# Allegro board SHEMA 2.7 .brd
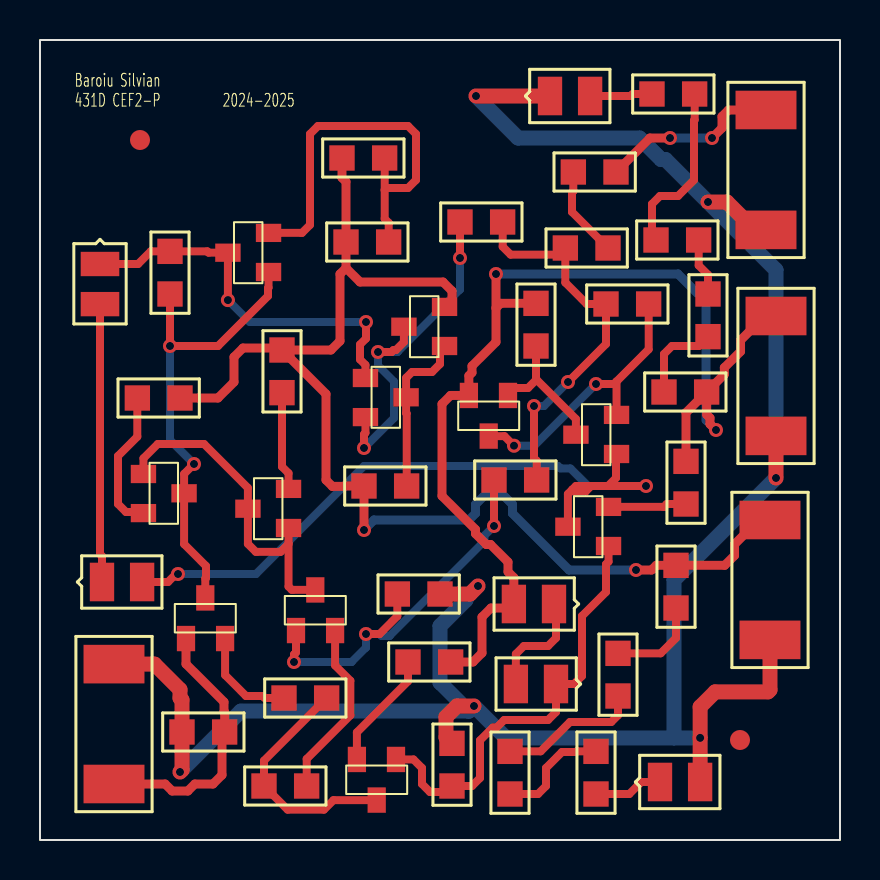
[diagram p0: board, top side]
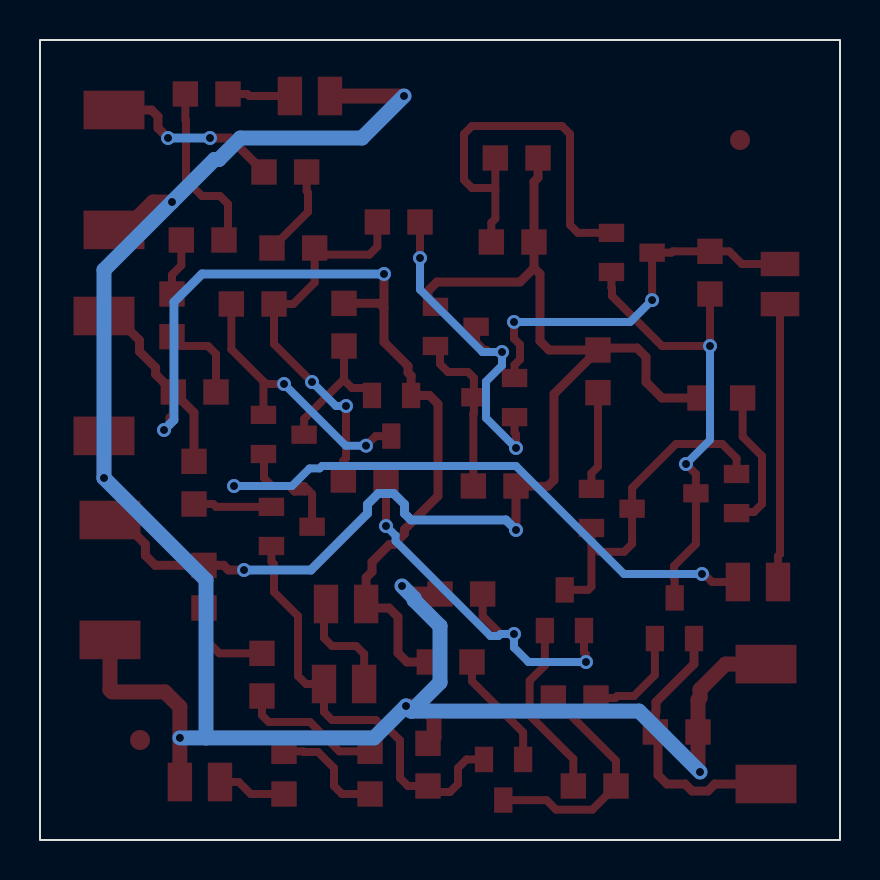
[diagram p1: board, bottom side, seen from below]

Outline 40 x 40 mm; copper layers: TOP, BOTTOM. Coordinates in mm from the lower left corner of the outline.
Outline path: rectangle 0,0 40,40

## Design rules (mm)
nets with their own width: min track width 0.4; nets N15441 N15523 N15531 N15535 N15551 N15571 N15607 N15635 N15643 N15675 N15769 N15797 N15821 N15879 N15941 N15973 N16049 N16101 N19975 N21462 N41039 N41221 N51552 N52657 N302061 N337091 N338151 N342841 N343061 N343281
nets with their own width: min track width 0.45; nets V+ V- VIN VOUT
nets with their own width: min track width 0.75; nets GND

## Placement (name value [footprint] x y rotation side)
C1  470p  [SMC0805]  6.5 27.3 90 top
C2  10n  [SMC0805]  15.3 29.9 0 top
D2  5V,LED,LED  [SMD080512]  31 2.9 0 top
D3  5V,LED,LED  [SMD080512]  25.5 37.2 0 top
D4  1N4148  [SMD0805]  25.7 11.8 180 top
D5  1N4148  [SMD0805]  25.8 7.8 180 top
D6  1N4148  [SMD0805]  3.1 12.9 0 top
D7  1N4148  [SMD0805]  3 28.8 270 top
J1  CON2  [SMR2512]  3.7 2.8 90 top
J2  CON2  [SMR2512]  36.5 16 270 top
J3  CON2  [SMR2512]  36.8 26.2 270 top
J4  CON2  [SMR2512]  36.3 36.5 270 top
NOREF  -  [unnamed]  35 5 0 top
NOREF#2  -  [unnamed]  5 35 0 top
Q1  QBC856B  [TO236]  7.3 10.2 270 top
Q2  QBC856B  [TO236]  12.8 10.6 270 top
Q3  QBC856B  [TO236]  17.8 3.9 90 top
Q4  QBC856B  [TO236]  28.3 14.7 0 top
Q6  QBC846B  [TO236]  11.3 28.4 0 top
Q7  QBC846B  [TO236]  5.3 18.3 180 top
Q8  QBC846B  [TO236]  12.3 15.6 0 top
Q9  QBC846B  [TO236]  28.7 19.3 0 top
Q10  QBC856B  [TO236]  23.4 22.1 90 top
Q11  QBC846B  [TO236]  20.1 24.7 0 top
Q12  QBC856B  [TO236]  16.4 23.1 180 top
R1  220k  [SMR0805]  7.1 5.4 0 top
R2  10  [SMR0805]  12.2 7.1 0 top
R3  10  [SMR0805]  11.2 2.7 0 top
R4  1k  [SMR0805]  18.4 8.9 0 top
R5  9.1k  [SMR0805]  20.6 2.7 90 top
R6  2.2k  [SMR0805]  32.3 16.8 90 top
R7  10k  [SMR0805]  24.8 24.7 90 top
R8  22  [SMR0805]  28.3 26.8 0 top
R9  9.1k  [SMR0805]  22.7 18 0 top
R10  1k  [SMR0805]  20 12.3 180 top
R11  1k  [SMR0805]  7 22.1 180 top
R12  1k  [SMR0805]  12.1 24.5 270 top
R13  10k  [SMR0805]  15.1 34.1 0 top
R14  22  [SMR0805]  21 30.9 0 top
R15  100  [SMR0805]  16.2 17.7 0 top
R16  51  [SMR0805]  28.4 29.6 180 top
R17  10  [SMR0805]  28.8 33.4 180 top
R19  220  [SMR0805]  31.8 11.6 90 top
R20  220  [SMR0805]  28.9 7.2 90 top
R21  220  [SMR0805]  23.5 2.3 90 top
R22  220  [SMR0805]  27.8 2.3 90 top
R23  220  [SMR0805]  31.2 22.4 0 top
R24  220  [SMR0805]  33.4 27.3 270 top
R25  220  [SMR0805]  30.8 30 0 top
R26  220  [SMR0805]  30.6 37.3 0 top

## Library data of the parts
C1 C2 = C
D2 D3 = LED_0
D4-D7 = 1N4148_3
J1-J4 = CON2
Q1-Q4 Q10 Q12 = QBC856B_1
Q6-Q9 Q11 = QBC846B_1
R1-R17 R19-R26 = R

## Footprints (pads in the part's own frame, mm; a bottom-side part is the same pattern mirrored in y, then rotated)
SMC0805
  rect 1.27x1.27 smd: 1(0,0) 2(2.134,0)
SMD0805
  rect 1.219x1.93 smd: A(2.007,0) C(0,0)
SMD080512
  rect 1.219x1.93 smd: 1(0,0) 2(2.007,0)
SMR0805
  rect 1.27x1.27 smd: 1(0,0) 2(2.134,0)
SMR2512
  rect 1.93x3.048 smd: 1(0,0) 2(5.994,0)
TO236
  rect 1.27x0.914 smd: 1(0.127,0) 2(0.127,1.956) 3(-1.905,0.965)
unnamed
  round 1 smd: (0,0)

## Nets
GND: D2.2 D3.1 J1.2 J2.2 J3.2 J4.2 R1.1 R5.2 R10.1
VIN: J1.1 Q1.1 R1.2
V+: D4.A J3.1 Q10.2(E) R4.2 R6.2 R7.2 R23.2
V-: C2.1 J2.1 Q11.2(E) R11.1 R12.1 R13.1 R15.1 R19.2
VOUT: J4.1 R17.1
N15441: D5.C(CAT) Q3.1 Q4.1 R5.1
N15523: Q1.2(E) R2.1
N15531: Q3.3 R2.2 R3.1
N15535: Q2.2(E) R3.2
N15551: Q3.2(E) R4.1
N15571: Q4.2(E) R6.1
N15607: C1.2 D7.C(CAT) Q6.3 Q12.1
N15635: C1.1 Q1.3 Q6.1 Q7.3
N15643: D6.A Q4.3 Q9.1
N15675: C2.2 Q6.2(E) R13.2
N15769: Q2.3 Q7.1 Q8.1 Q8.3
N15797: Q7.2(E) R11.2
N15821: Q8.2(E) R12.2
N15879: Q9.3 Q10.1 R7.1
N15941: Q9.2(E) Q10.3 R8.2
N15973: R8.1 R9.2 R14.2 R16.2
N16049: Q11.3 Q12.2(E) R14.1
N16101: Q11.1 Q12.3 R15.2
N19975: Q2.1 R9.1 R10.2
N21462: D6.C(CAT) D7.A
N41039: D2.1 R22.1
N41221: D3.2 R26.1
N51552: R16.1 R17.2
N52657: D4.C(CAT) D5.A
N302061: R19.1 R20.2
N337091: R20.1 R21.2
N338151: R21.1 R22.2
N342841: R23.1 R24.2
N343061: R24.1 R25.2
N343281: R25.1 R26.2

## Via types
v1: diameter 0.7, hole 0.4, TOP to BOTTOM, 29 vias

## Routing (per net, layer and track width the routed paths; a pad name or vN(x,y) marks a point on that pad's centre or on a via; arc(x,y) is an arc through that point)
GND: length 112.3
  TOP w0.75: v1(21.7,6.7) 20.85,6.7 20.3,6.15 20.3,5.13 R5.2 ; v1(33.4,31.9) 34.35,31.9 35.74,30.51 J4.2 ; J2.2 36.5,7.51 36.4,7.41 33.76,7.41 33.01,6.66 v1(33.01,5.11) D2.2 ; v1(7,3.4) 7.1,3.5 R1.1 7.1,7 7,7.1 7,7.52 5.73,8.79 J1.2 ; v1(21.9,12.7) 21.5,12.3 R10.1 ; v1(21.8,37.2) D3.1 ; J3.2 v1(36.8,18.1)
  BOTTOM w0.75: 31.7,5.11 v1(33.01,5.11) ; 31.7,5.11 23.29,5.11 v1(21.7,6.7) 21.45,6.45 21.43,6.45 ; 31.7,5.11 31.7,13 v1(36.8,18.1) 36.8,28.5 v1(33.4,31.9) 31.27,34.02 31.05,34.02 29.98,35.1 23.9,35.1 v1(21.8,37.2) ; 21.43,6.45 10.04,6.45 v1(7,3.4) ; 21.43,6.45 20,7.87 20,10.7 21.3,12 21.3,12.1 v1(21.9,12.7)
VIN: length 13.6
  TOP w0.45: Q1.1 7.3,8.8 9.2,6.9 9.2,6.42 9.23,6.39 R1.2 9.1,5.27 9.1,3.25 8.65,2.8 7.74,2.8 7.39,2.45 6.61,2.45 6.26,2.8 J1.1
V+: length 56.5
  TOP w0.45: R23.2 32.3,21.37 R6.2 ; R23.2 33.33,21.27 33.5,21.1 33.5,20.8 v1(33.8,20.5) ; R23.2 34.22,23.28 34.22,23.62 35.03,24.43 35.03,24.99 36.24,26.2 J3.1 ; 22.8,26.6 23.03,26.83 R7.2 ; 22.8,26.6 22.8,24.9 21.6,23.7 21.6,23.37 21.44,23.21 Q10.2 20.53,22.23 20.1,21.8 20.1,17.2 21.77,15.53 21.77,15.32 22.32,14.78 22.52,14.78 23.4,13.9 23.4,13.41 23.69,13.12 D4.A 23.49,11.6 22.55,11.6 22.1,11.15 22.1,9.35 21.65,8.9 R4.2 ; 22.8,26.6 v1(22.8,28.3)
  BOTTOM w0.45: v1(22.8,28.3) 31.9,28.3 33.3,26.9 33.3,21 v1(33.8,20.5)
V-: length 62.3
  TOP w0.45: R13.1 15.1,33.11 15.3,32.91 C2.1 15.3,28.6 ; v1(29.8,13.5) 30.58,13.5 30.81,13.73 R19.2 34.23,13.73 34.73,14.23 34.73,14.79 35.94,16 J2.1 ; 15.3,28.6 15,28.3 15,24.95 14.55,24.5 R12.1 ; 15.3,28.6 16,27.9 20.15,27.9 20.6,27.45 20.6,27.03 Q11.2 ; R12.1 12,24.6 10.15,24.6 9.7,24.15 9.7,22.9 8.9,22.1 R11.1 ; R12.1 14.3,22.3 14.3,18 14.62,17.68 15.19,17.68 15.21,17.7 R15.1 v1(16.2,15.5)
  BOTTOM w0.45: v1(16.2,15.5) 16.7,16 21.45,16 21.77,16.33 21.77,16.78 22.32,17.32 23.08,17.32 23.62,16.78 23.62,16.33 26.45,13.5 v1(29.8,13.5)
VOUT: length 9.1
  TOP w0.45: J4.1 34.42,36.5 34.1,36.18 34.1,35.6 v1(33.6,35.1) ; R17.1 30.5,35.1 v1(31.5,35.1)
  BOTTOM w0.45: v1(33.6,35.1) v1(31.5,35.1)
N15441: length 21.8
  TOP w0.4: Q3.1 18.67,4.03 19.1,3.6 19.1,2.8 19.5,2.4 20.3,2.4 R5.1 21.6,2.7 22,3.1 22,4.98 22.64,5.62 22.83,5.62 23.21,6 25.4,6 25.8,6.4 D5.C 26.7,7.8 27.1,8.2 27.1,11.2 28.3,12.4 28.3,13.79 28.43,13.92 Q4.1
N15523: length 5.2
  TOP w0.4: R2.1 11.24,7.1 11.14,7.2 10.3,7.2 9.26,8.24 Q1.2
N15531: length 12
  TOP w0.4: 16.83,2 14.68,2 14.2,1.51 12.38,1.51 R3.1 11.2,3.97 R2.2
N15535: length 9
  TOP w0.4: R3.2 13.33,4.05 15.52,6.24 15.52,7.96 14.76,8.73 Q2.2
N15551: length 5.9
  TOP w0.4: Q3.2 15.84,5.38 18.4,7.94 R4.1
N15571: length 3.9
  TOP w0.4: Q4.2 31.19,16.66 31.34,16.8 R6.1
N15607: length 19.5
  TOP w0.4: Q12.1 16.27,23.75 16,24.03 16,24.77 16.3,25.07 v1(16.3,25.9) ; v1(9.39,27) Q6.3 8.43,29.37 8.36,29.43 C1.2 5.54,29.43 4.9,28.8 D7.C
  BOTTOM w0.4: v1(16.3,25.9) 10.49,25.9 v1(9.39,27)
N15635: length 23.5
  TOP w0.4: Q6.1 11.43,27.62 11.4,27.59 11.4,27.2 8.9,24.7 v1(6.5,24.7) C1.1 ; Q1.3 8.27,13.07 8.3,13.1 8.3,13.7 7.21,14.79 Q7.3 7.21,18.3 v1(7.7,18.8)
  BOTTOM w0.4: v1(7.7,18.8) 6.5,20 v1(6.5,24.7)
N15643: length 36.6
  TOP w0.4: 26.62,17.52 26.8,17.7 27.56,17.7 ; 26.62,17.52 26.72,17.42 27.28,17.42 27.56,17.7 ; 26.62,17.52 26.39,17.3 Q4.3 ; 28.4,17.7 28.8,18.1 28.8,19.27 Q9.1 ; 28.4,17.7 v1(30.3,17.7) ; 28.4,17.7 27.56,17.7 ; v1(6.9,13.3) 6.8,13.3 6.4,12.9 D6.A
  BOTTOM w0.4: v1(6.9,13.3) 10.8,13.3 16.2,18.7 25.9,18.7 26.02,18.58 26.52,18.58 27.4,17.7 v1(30.3,17.7)
N15675: length 20.8
  TOP w0.4: Q6.2 13.1,30.36 13.5,30.76 13.5,35.3 13.9,35.7 18.4,35.7 18.8,35.3 18.8,33 18.4,32.6 17.33,32.6 17.23,32.5 ; 17.23,32.5 R13.2 ; 17.23,32.5 17.23,31.06 17.43,30.86 C2.2
N15769: length 16.7
  TOP w0.4: Q8.1 12.43,14.8 ; 12.43,14.8 12.03,14.4 10.79,14.4 10.39,14.8 Q8.3 10.39,17.61 8.2,19.8 5.89,19.8 5.17,19.08 Q7.1 ; 12.43,14.8 12.43,12.67 12.6,12.51 Q2.3
N15797: length 7.3
  TOP w0.4: 5,16.34 Q7.2 5.12,16.4 4.3,16.4 3.9,16.8 3.9,19.2 4.87,20.17 R11.2
N15821: length 4.9
  TOP w0.4: R12.2 12.1,18.67 12.43,18.34 Q8.2
N15879: length 7
  TOP w0.4: 24.8,23 24.84,23 26.8,21.05 26.8,20.27 ; 24.8,23 R7.1 ; 24.8,23 24.4,22.6 23.77,22.6 Q10.1
N15941: length 14.1
  TOP w0.4: R8.2 30.43,24.53 28.83,22.93 ; Q9.2 28.83,22.93 ; 28.83,22.93 28.7,22.8 v1(27.8,22.8) ; Q10.3 23.22,20.2 v1(23.7,19.71)
  BOTTOM w0.4: v1(23.7,19.71) 24.71,19.71 v1(27.8,22.8)
N15973: length 19.5
  TOP w0.4: v1(26.4,22.9) 28.3,24.8 R8.1 27.34,26.8 26.27,27.87 R16.2 25.93,29.27 23.53,29.27 23.13,29.67 R14.2 ; v1(24.7,21.7) 24.7,19.1 24.83,18.96 R9.2
  BOTTOM w0.4: v1(26.4,22.9) 25.2,21.7 v1(24.7,21.7)
N16049: length 18.4
  TOP w0.4: Q12.2 16.27,20.36 16.2,20.29 v1(16.2,19.6) ; R14.1 v1(21,29.1) ; Q11.3 18.2,24.9 17.8,24.5 17.68,24.5 17.58,24.4 v1(16.9,24.4)
  BOTTOM w0.4: v1(21,29.1) 21,27.52 17.88,24.4 v1(16.9,24.4) 16.9,23.72 17.7,22.92 17.7,21.1 v1(16.2,19.6)
N16101: length 8.4
  TOP w0.4: Q11.1 20,24.47 20,23.8 19.6,23.4 18.6,23.4 18.3,23.11 Q12.3 18.3,21.35 18.33,21.32 R15.2
N19975: length 20.4
  TOP w0.4: R9.1 v1(22.7,15.7) ; v1(16.3,10.3) 16.98,10.3 17.87,11.19 R10.2 ; v1(12.7,8.9) 12.7,9.28 12.8,9.38 Q2.1
  BOTTOM w0.4: v1(22.7,15.7) 22.22,15.22 22.22,14.94 17.48,10.2 17.08,10.2 16.98,10.3 v1(16.3,10.3) 16.3,9.62 15.58,8.9 v1(12.7,8.9)
N21462: length 13.9
  TOP w0.4: D6.C 3.1,14.19 3,14.29 D7.A
N41039: length 3.4
  TOP w0.4: R22.1 29.46,2.3 30.06,2.9 D2.1
N41221: length 3.1
  TOP w0.4: D3.2 29.54,37.2 29.64,37.3 R26.1
N51552: length 4.6
  TOP w0.4: R17.2 26.67,32.44 26.6,32.37 26.6,31.4 R16.1
N52657: length 5.6
  TOP w0.4: D5.A 23.79,9.3 24.19,9.7 25.4,9.7 25.8,10.1 25.8,11.7 D4.C
N302061: length 4.7
  TOP w0.4: R19.1 31.8,10.1 31.03,9.33 R20.2
N337091: length 7.1
  TOP w0.4: R20.1 28.9,6.24 28.56,5.9 26.5,5.9 25.03,4.43 R21.2
N338151: length 5.7
  TOP w0.4: R22.2 26.84,4.43 26.8,4.4 26.1,4.4 25.3,3.6 25.3,2.7 24.9,2.3 R21.1
N342841: length 4.5
  TOP w0.4: R23.1 31.2,24.3 31.6,24.7 32.93,24.7 R24.2
N343061: length 2.9
  TOP w0.4: R25.2 32.93,28.73 33.4,28.26 R24.1
N343281: length 8.8
  TOP w0.4: R26.2 32.73,36.01 32.7,35.97 32.7,33 31.9,32.2 31,32.2 30.6,31.8 30.6,30.2 R25.1

## Text on the board
Ref Des/Silkscreen Top: Baroiu Silvian | 431D CEF2-P | 2024-2025
XSECTION_CHART: *  SURFACE - AIR 0 MM | L1 TOP CONDUCTOR - COPPER 0.03048 MM | *  DIELECTRIC - FR-4 0.2032 MM | L2 BOTTOM CONDUCTOR - COPPER 0.03048 MM | DESIGN CROSS SECTION CHART | ___________________________ | TOTAL THICKNESS 0.26416 MM | 1-2
NCLEGEND-1-2: FIGURE | FINISHED_SIZE | 0.4 | DRILL CHART: TOP to BOTTOM | ALL UNITS ARE IN MILLIMETERS | PLATED | QTY | 29
